# Altium PCB Siren_USB.PcbDoc
Units mil, origin at the board's own origin, x right, y up, seen from the top; angles counter-clockwise.
Board outline 6000 x 4000 mil, 2 copper layers (Top Layer, Bottom Layer); 36 components, 24 nets, 156 pads, 6 vias.
Unrouted connection lines stored in the file: 98.
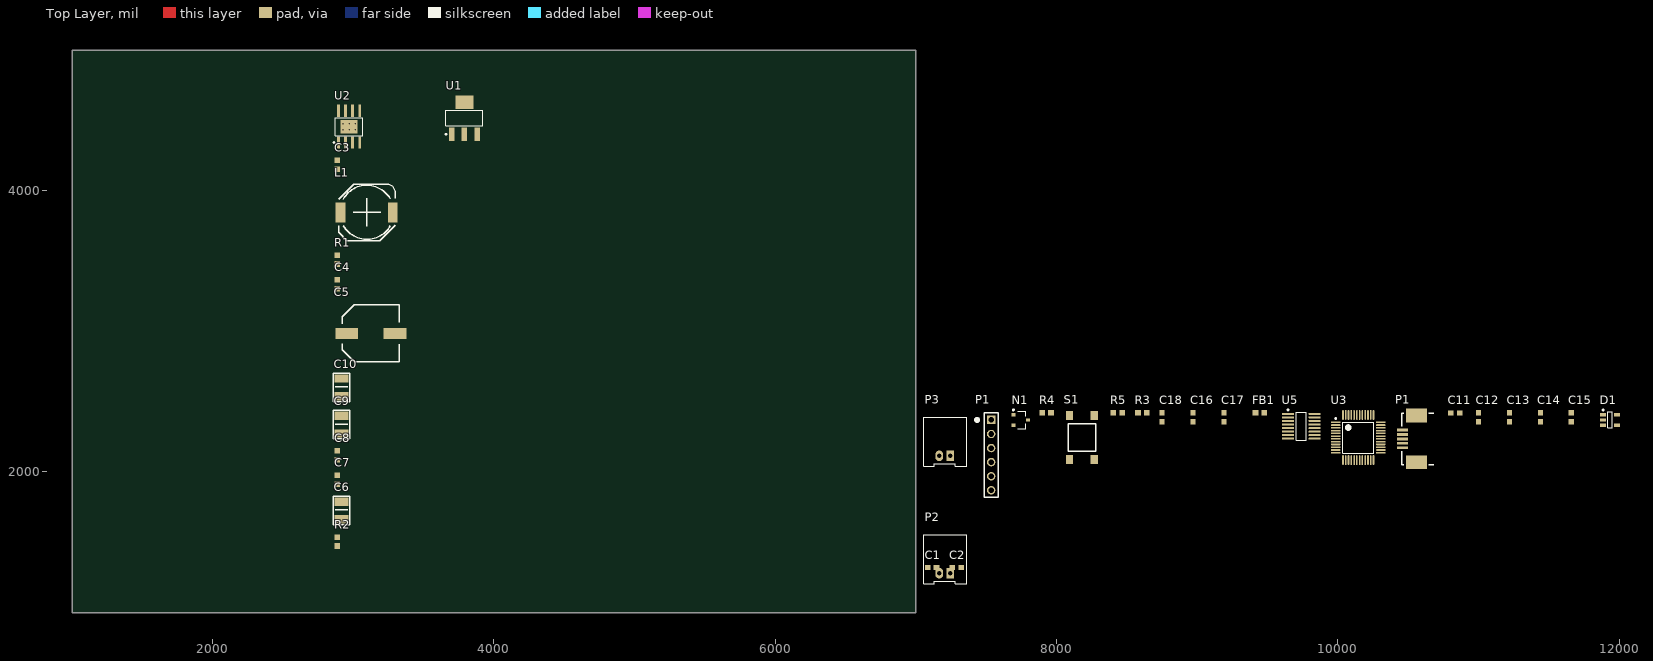
[diagram p0: Top Layer view]
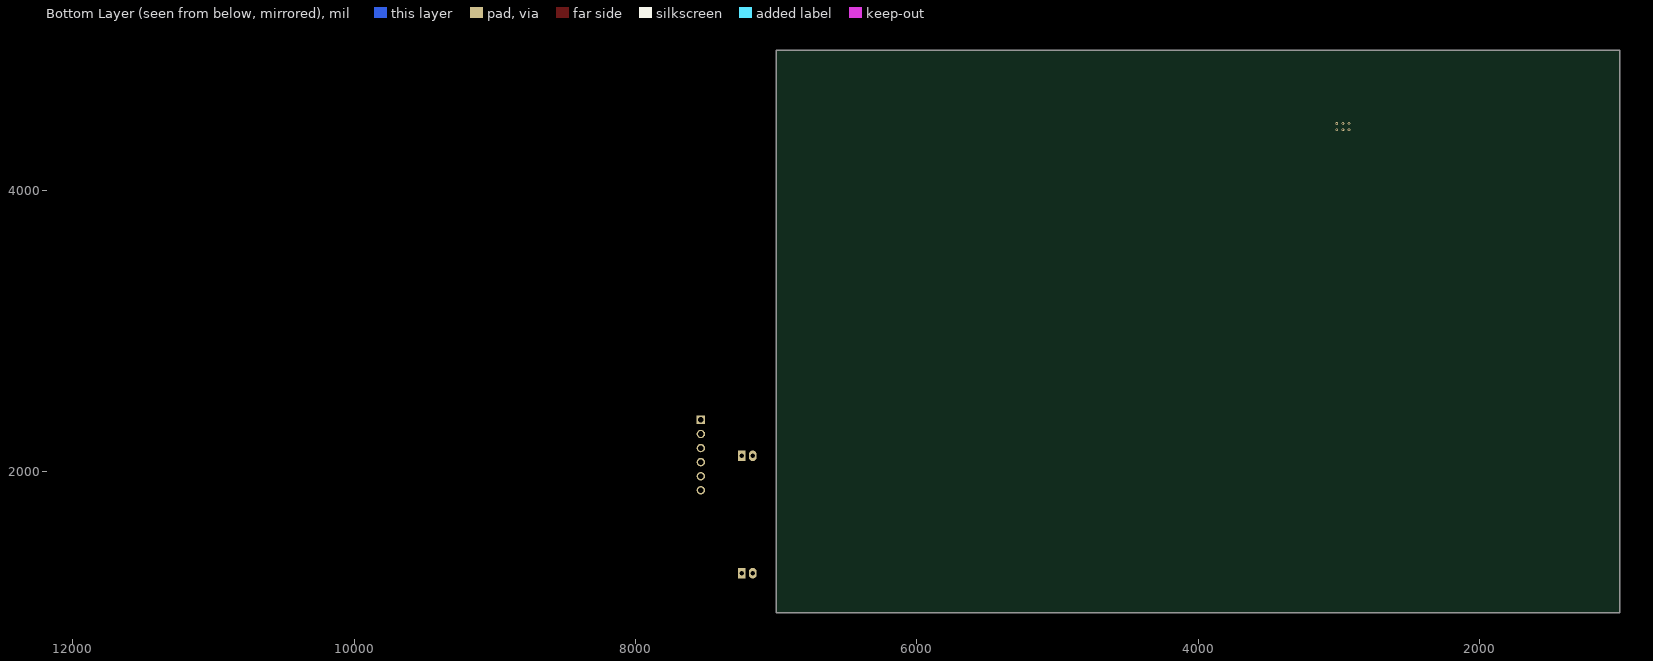
[diagram p1: Bottom Layer view, seen from below]

## Layer stack, top to bottom
Top Solder: solder mask 0.4, Solder Resist, Dk 3.5
Top Layer: signal copper 1.4
Dielectric 1: dielectric 12.6, FR-4, Dk 4.8
Bottom Layer: signal copper 1.4
Bottom Solder: solder mask 0.4, Solder Resist, Dk 3.5

## Board outline
1000,1000 7000,1000 7000,5000 1000,5000

## Design rules (kind name [scope] priority, off if disabled: settings)
Clearance [All] p1: gap=10 ignorepadtopadclearanceinfootprint=FALSE except(0: Arc-Hole Track-Hole SMDPad-Hole THPad-Hole Via-Hole Fill-Hole Poly-Hole Region-Hole Text-Hole)
PolygonConnect [All] p1: connectstyle=Relief reliefconductorwidth=10 reliefentries=4 polygonreliefangle="90 Angle" airgapwidth=10
RoutingVias [All] p1: holewidth=28 width=50 viastyle="Through Hole" minholewidth=28 minwidth=50 maxholewidth=28 maxwidth=50
SolderMaskExpansion [All] p1: expansion=4
Width [All] p1: maxlimit=10 minlimit=10 preferedwidth=10
30 further rules are at their usual default settings.

## Components (designator, comment, footprint, x,y, rotation, side; value= is the part's Value field where it differs from the comment)
C1 "Cap" CAPC0603 7115,1320 r0 top value=1uF
C2 "Cap" CAPC0603 7290,1320 r0 top value=1uF
C3 "Cap" CAPC0603 2885,4185 r90 top value=470nF
C4 "Cap" CAPC0603 2885,3335 r90 top value=75pF
C5 "EEHZA1H101P" EEHZA1H101P 3125,2985 r90 top value=100uF
C6 "Cap" CAP1210 2915,1790 r90 top value=10uF
C7 "Cap" CAPC0603 2885,1945 r90 top value=100nF
C8 "Cap" CAPC0603 2885,2120 r90 top value=10uF
C9 "Cap" CAP1210 2915,2400 r90 top value=47uF
C10 "Cap" CAP1210 2915,2665 r90 top value=47uF
C11 "Cap" CAPC0603 10835,2420 r0 top value=1uF
C12 "Cap" CAPC0603 11000,2390 r90 top value=10nF
C13 "Cap" CAPC0603 11220,2390 r90 top value=100nF
C14 "Cap" CAPC0603 11440,2390 r90 top value=100nF
C15 "Cap" CAPC0603 11660,2390 r90 top value=100nF
C16 "Cap" CAPC0603 8970,2390 r90 top value=4.7uF
C17 "Cap" CAPC0603 9190,2390 r90 top value=100nF
C18 "Cap" CAPC0603 8750,2390 r90 top value=100nF
D1 "824011" SOT95P280X116-5N 11935,2370 r0 top
FB1 "FBead" RES0603 9445,2420 r0 top
L1 "MSS1048-563MLB" MSS1048-563MLB 3095,3845 r90 top value=56uH
N1 "SSM3K329R,LF" SSM3K329R,LF 7745,2370 r0 top
P1 "SWD" SWD_STM32 7535,2370 r0 top
P1 "UX60SC-MB-5ST" UX60SC-MB-5ST 10460,2235 r90 top
P2 "2-pin Horz Sherlock" MOLEX-HDR-1X2-SHERLOCK-HORZ 7245,1280 r0 top
P3 "2-pin Horz Sherlock" MOLEX-HDR-1X2-SHERLOCK-HORZ 7245,2115 r0 top
R1 "Res" RES0603 2885,3510 r90 top value=40.2k
R2 "Res" RES0603 2885,1505 r90 top value=10k
R3 "Res" RES0603 8610,2420 r0 top value=100
R4 "Res" RES0603 7930,2420 r0 top value=10k
R5 "Res" RES0603 8435,2420 r0 top value=1k
S1 "Button" PTS645xxxxSMTR92 8180,2245 r90 top
U1 "3.3V LDO Reg" SOT23-4n 3790,4515 r90 top
U2 "LMR23610ADDAR" LMR23610ADDAR 2970,4455 r90 top
U3 "STM32F072CB" STM32F072CB 10145,2245 r0 top
U5 "FT230XS" FT230XS 9740,2325 r0 top

## Footprints (in the part's own frame and the unit in brackets; to place one, negate y for a bottom-side part, rotate by r counter-clockwise, add the part's x,y. Pads: shape width x height; smd on the part's side, far side on the other; paste and mask are expansions set on the pad)
CAP1210 [mm]
  rect 1.5x2.5 smd: 1(-0.02,0) 2(-3.2,0)
  silkscreen extent -4.2,-1.48 0.97,1.48, body extent -3.22,-1.25 0,1.26, height 2.5
CAPC0603 [mm] "Chip Capacitor, 2-Leads, Body 1.60x0.80mm, IPC Medium Density"
  rect 1x0.95 smd: 1(-0.8,0) 2(0.8,0)
  body extent -0.88,-0.48 0.87,0.48, height 0.8
EEHZA1H101P [mm] "CAP ALUM POLY HYB 100UF 50V SMD"
  rect 2x4.1 smd: 1(0,4.35) 2(0,-4.35)
  silkscreen extent -5.15,-5.15 5.15,5.15, body extent -5.24,-5.99 5.25,5.99, height 10.54
FT230XS [mm] "SOP, 16-Leads, Body 4.90x3.90mm, Pitch 0.64mm, IPC Medium Density"
  oval 2.2x0.35 smd: 1(-2.4,2.222) 2(-2.4,1.587) 3(-2.4,0.953) 4(-2.4,0.318) 5(-2.4,-0.318) 6(-2.4,-0.953) 7(-2.4,-1.587) 8(-2.4,-2.222) 9(2.4,-2.222) 10(2.4,-1.587) 11(2.4,-0.953) 12(2.4,-0.318) 13(2.4,0.318) 14(2.4,0.953) 15(2.4,1.587) 16(2.4,2.222)
  silkscreen extent -2.52,-2.5 0.9,3.07, body extent -2,-2.5 2,2.5, height 1.76
LMR23610ADDAR [mm] "IC REG BUCK ADJ 1A SYNC 8SOPWRPD"
  rect 2.2x0.5 smd: 1(-2.875,1.905) 2(-2.875,0.635) 3(-2.875,-0.635) 4(-2.875,-1.905) 5(2.875,-1.905) 6(2.875,-0.635) 7(2.875,0.635) 8(2.875,1.905)
  rect 2.4x3.1 smd: 9(0,0)
  silkscreen extent -3,-2.5 1.6,2.83, body extent -2,-2.5 2,2.5, height 1.7
MOLEX-HDR-1X2-SHERLOCK-HORZ [mm]
  rect 1.397x1.905 hole 0.8: 1(0,0)
  oval 1.397x1.905 hole 0.8: 2(-2,0)
  silkscreen extent -4.83,-1.91 2.92,6.98, body extent -4.83,-1.91 2.87,8.59, height 5.54
MSS1048-563MLB [mm] "FIXED IND 56UH 1.7A 126 MOHM"
  rect 3.56x1.78 smd: 1(0,4.7) 2(0,-4.7)
  silkscreen extent -5.06,-5.13 5.14,5.07, body extent -5.1,-5.15 5.1,5.15, height 5
PTS645xxxxSMTR92 [mm] "PTS645 Series SMT 6 mm Tactile Switch"
  rect 1.555x1.3 smd: A(-3.975,2.25) A(3.975,2.25) B(-3.975,-2.25) B(3.975,-2.25)
  silkscreen extent -2.5,-2.5 2.5,2.5, body extent -3,-3 3,3, height 4.5
RES0603 [mm] "Chip Resistor, 2-Leads, Body 1.60x0.80mm, IPC Medium Density"
  rect 1.05x1 smd: 1(-0.8,0) 2(0.8,0)
  body extent -0.88,-0.48 0.87,0.47, height 0.8
SOT23-4n [mm] "SOT223, 4-Leads, Body 6.50x7.00mm (avg), Pitch 2.30mm, IPC Medium Density"
  rect 2.4x1 smd: 1(-2.9,2.3) 2(-2.9,0) 3(-2.9,-2.3)
  rect 2.4x3.2 smd: 4(2.9,0)
  silkscreen extent -3.02,-3.35 1.4,3.47, body extent -1.85,-3.35 1.85,3.35, height 1.7
SOT95P280X116-5N [mm] "SOT23, 5-Leads, Body 2.90x2.80mm, Pitch 0.95mm, IPC Medium Density"
  rect 1.1x0.6 smd: 1(-1.25,0.95) 2(-1.25,0) 3(-1.25,-0.95) 4(1.25,-0.95) 5(1.25,0.95)
  silkscreen extent -1.37,-1.45 0.4,1.92, body extent -0.8,-1.45 0.8,1.45, height 1.16
SSM3K329R,LF [mm] "MOSFET N CH 30V 3.5A 2-3Z1A"
  rect 0.7x0.6 smd: 1(-1.3,0.95) 2(-1.3,-0.95) 3(1.3,0)
  silkscreen extent -1.42,-1.55 0.95,1.92, body extent -0.95,-1.55 0.95,1.55, height 0.8
STM32F072CB [mm] "TSQFP, 48-Leads, Body 7.00x7.00mm, Pitch 0.50mm, IPC Medium Density"
  oval 1.75x0.3 smd: 1(-4.075,2.75) 2(-4.075,2.25) 3(-4.075,1.75) 4(-4.075,1.25) 5(-4.075,0.75) 6(-4.075,0.25) 7(-4.075,-0.25) 8(-4.075,-0.75) 9(-4.075,-1.25) 10(-4.075,-1.75) 11(-4.075,-2.25) 12(-4.075,-2.75) 25(4.075,-2.75) 26(4.075,-2.25) 27(4.075,-1.75) 28(4.075,-1.25) 29(4.075,-0.75) 30(4.075,-0.25) 31(4.075,0.25) 32(4.075,0.75) 33(4.075,1.25) 34(4.075,1.75) 35(4.075,2.25) 36(4.075,2.75)
  oval 0.3x1.75 smd: 13(-2.75,-4.075) 14(-2.25,-4.075) 15(-1.75,-4.075) 16(-1.25,-4.075) 17(-0.75,-4.075) 18(-0.25,-4.075) 19(0.25,-4.075) 20(0.75,-4.075) 21(1.25,-4.075) 22(1.75,-4.075) 23(2.25,-4.075) 24(2.75,-4.075) 37(2.75,4.075) 38(2.25,4.075) 39(1.75,4.075) 40(1.25,4.075) 41(0.75,4.075) 42(0.25,4.075) 43(-0.25,4.075) 44(-0.75,4.075) 45(-1.25,4.075) 46(-1.75,4.075) 47(-2.25,4.075) 48(-2.75,4.075)
  silkscreen extent -4.2,-2.8 2.8,3.57, body extent -3.5,-3.5 3.5,3.5, height 1.6
SWD_STM32 [mil] "SWD connector matching the pinout on STM Discovery Boards"
  rect 60x60 hole 39.37: 1(0,0)
  round 60 hole 39.37: 2(0,-100) 3(0,-200) 4(0,-300) 5(0,-400) 6(0,-500)
  silkscreen extent -110,-550 50,50
UX60SC-MB-5ST [mm] "USB Mini-B Recepticle"
  rect 0.5x2 smd: 1(-1.6,0) 2(-0.8,0) 3(0,0) 4(0.8,0) 5(1.6,0)
  rect 2.5x3.8 smd: SHD(-4.2,-2.5) SHD(4.2,-2.5)
  silkscreen extent -4.62,-5.63 4.62,0.13, body extent -4.9,-6.61 4.9,0.39, height 3.95

## Part data
C1 C2 C3 C4 C6 C7 C8 C13 C14 C15 C17 C18: Supplier Part Number 1=1276-1000-1-ND, Supplier 1=Digi-Key
C5: "CAP ALUM POLY HYB 100UF 50V SMD", Manufacturer 1=Panasonic, Supplier Part Number 1=P15442CT-ND, Tolerance=20%, Voltage=50V, ComponentLink1Description="Web Site", ComponentLink1URL=https://na.industrial.panasonic.com/products/capacitors/aluminum-electrolytic-capacitors/conductive-polymer-hybrid-aluminum-electrolytic/series/za-high-temp-reflow/ABA0135/model/EEHZA1H101P, ComponentLink2Description="Data Sheet", ComponentLink2URL=https://industrial.panasonic.com/cdbs/www-data/pdf/RDD0000/ABA0000C1221.pdf, ComponentLink3Description="ZA Series Technical Data", ComponentLink3URL=https://industrial.panasonic.com/cdbs/www-data/pdf/RDD0000/ABA0000COS44.pdf, Manufacturer Part Number 1=EEHZA1H101P, Supplier 1=Digi-Key
C9 C10: Supplier Part Number 1=490-6538-1-ND, Supplier 1=Digi-Key
C16: Supplier Part Number 1=311-1455-1-ND, Supplier 1=Digi-Key
D1: "USB ESD Protection Diodes"
FB1: "Ferrite Bead", Supplier Part Number 1=445-2988-1-ND, Supplier 1=Digi-Key
L1: "FIXED IND 56UH 1.7A 126 MOHM", Manufacturer 1=Coilcraft, ComponentLink1Description="Web Site", ComponentLink1URL=https://www.coilcraft.com/mss1048.cfm, Manufacturer Part Number 1=MSS1048-563MLB, Supplier 1=Coilcraft, Supplier Part Number 1=MSS1048-563MLB
N1: "MOSFET N CH 30V 3.5A 2-3Z1A", Manufacturer 1="Toshiba Semiconductor and Storage", Supplier Part Number 1=SSM3K329RLFTR-ND, Manufacturer Part Number 1=SSM3K329R,LF, Supplier 1=Digi-Key
P1: library part SWD_STM32, "SWD connector matching the pinout on STM Discovery Boards"
P1: "USB Mini B Metal Shield SMT", Supplier Part Number 1=H11671CT-ND, Supplier 1=Digi-Key
P2 P3: library part MOLEX-HDR-1x2-SHERLOCK_RA, "Header, Molex, 2mm Pitch Sherlock Header, Single Row, Horizontal, 2 Circuits, Length 3.3mm,  0353630260", Manufacturer="Molex Inc", Manufacturer Part Number=0353630260, Supplier Part Number 1=WM18931-ND, Supplier 1=Digi-Key
R1: Supplier Part Number 1=RMCF0603FT40K2CT-ND, Supplier 1=Digi-Key
R2 R4: Supplier Part Number 1=RMCF0603JT10K0CT-ND, Supplier 1=Digi-Key
R3: Supplier Part Number 1=311-100LRDKR-ND, Supplier 1=Digi-Key
S1: "SPST Button", Supplier Part Number 1=CKN9087CT-ND, Supplier 1=Digi-Key
U1: library part LM3940IMPX-3.3, "IC REG LDO 3.3V 1A SOT223", Supplier Part Number 1=LM3940IMPX-3.3/NOPBCT-ND, Supplier 1=Digi-Key
U2: "IC REG BUCK ADJ 1A SYNC 8SOPWRPD", Manufacturer 1="Texas Instruments", Supplier Part Number 1=296-47267-1-ND, ComponentLink1Description=Datasheet, ComponentLink1URL=http://www.ti.com/lit/ds/symlink/lmr23610.pdf, ComponentLink2Description="Web Site", ComponentLink2URL=http://www.ti.com/product/LMR23610/description, Manufacturer Part Number 1=LMR23610ADDAR, Supplier 1=Digi-Key
U3: "MCU 32BIT 128KB FLASH 48LQFP", Supplier Part Number 1=497-14645-ND, Supplier 1=Digi-Key
U5: "USB To Basic UART IC", Supplier Part Number 1=768-1154-5-ND, Supplier 1=Digi-Key
C11 C12 R5: Supplier 1=Digi-Key

## Via types
v1: diameter 20, hole 10, Top Layer to Bottom Layer, 6 vias

## Nets (pads, with @x,y where several pads share a name; then routed paths per layer and width w, separated by ;. In a path a pad name is that pad's centre, name@x,y a point inside that pad or via, vN(x,y) a via of type N, cw(c..) or ccw(c..) an arc to the next point about the centre after c; other vN are vias at no path point)
3V3: C2.1 C11.1 C12.1 C13.1 C14.1 C15.1 P1.1@7535,2370 R5.1 U1.3 U3.1 U3.9 U3.24 U3.36 U3.48
5V: C1.1 C4.1 C9.1 C10.1 C16.1 C17.1 D1.5 FB1.1 L1.2 R1.1 U1.1
24V: C5.1 C6.1 C7.1 P2.1 P3.2 U2.5 U2.7
CTS: U3.10 U5.2
Dminus: D1.4 P1.2@10460,2203.5 U5.9
Dplus: D1.3 P1.3@10460,2235 U5.8
GND: C1.2 C2.2 C5.2 C6.2 C7.2 C8.2 C9.2 C10.2 C11.2 C12.2 C13.2 C14.2 C15.2 C16.2 C17.2 C18.2 D1.2 N1.3 P1.3@7535,2170 P1.5@10460,2297.99 P1.SHD P2.2 R2.2 R4.2 S1.A U1.2 U1.4 U2.6 U2.8 U2.9 U3.8 U3.23 U3.35 U3.44 U3.47 U5.5 U5.13
  other v1: 2926.69,4433.35 2970,4433.35 3013.31,4433.35 2926.69,4476.65 2970,4476.65 3013.31,4476.65
NetC3_1: C3.1 U2.2
NetC3_2: C3.2 L1.1 U2.1
NetC4_2: C4.2 R1.2 R2.1 U2.4
NetC8_1: C8.1 U2.3
NetC18_1: C18.1 U5.3 U5.10
NetFB1_2: FB1.2 U5.12
NetN1_1: N1.1 R3.2 R4.1
NetN1_2: N1.2 P3.1
NRST: P1.5@7535,1970 R5.2 S1.B U3.7 U5.11
nRXLED: U5.14
nTXLED: U5.7
RTS: U3.11 U5.6
SIREN_PIN: R3.1 U3.18
SWCLK: P1.2@7535,2270 U3.37
SWDIO: P1.4@7535,2070 U3.34
USART_RX: U3.13 U5.1
USART_TX: U3.12 U5.4
pads on no net: D1.1 P1.1@10460,2172.01 P1.4@10460,2266.5 P1.6 U3.2 U3.3 U3.4 U3.5 U3.6 U3.14 U3.15 U3.16 U3.17 U3.19 U3.20 U3.21 U3.22 U3.25 U3.26 U3.27 U3.28 U3.29 U3.30 U3.31 U3.32 U3.33 U3.38 U3.39 U3.40 U3.41 U3.42 U3.43 U3.45 U3.46 U5.15 U5.16